# Altium PCB PA_Channel_RF3.PcbDoc
Units mm, origin at the board's own origin, x right, y up, seen from the top; angles counter-clockwise.
Board outline 40.62 x 29.5 mm, 2 copper layers (Top Layer, Bottom Layer), stack 1.071 mm thick; 37 components, 88 nets, 131 pads, 207 vias.
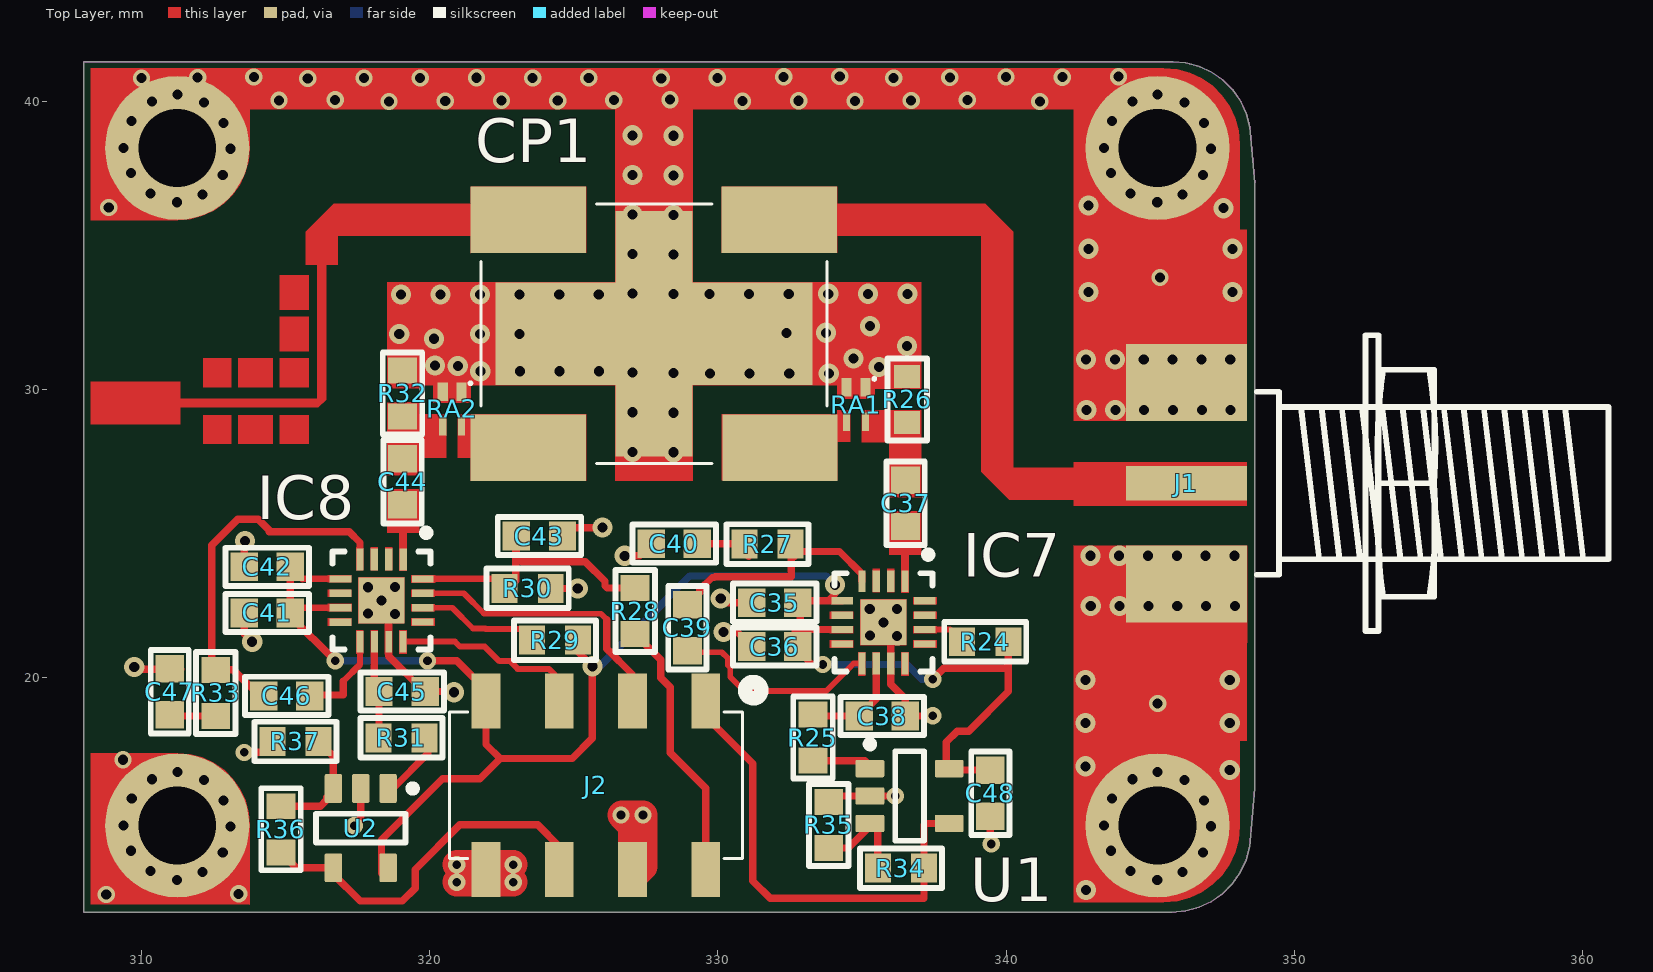
[diagram p0: Top Layer view]
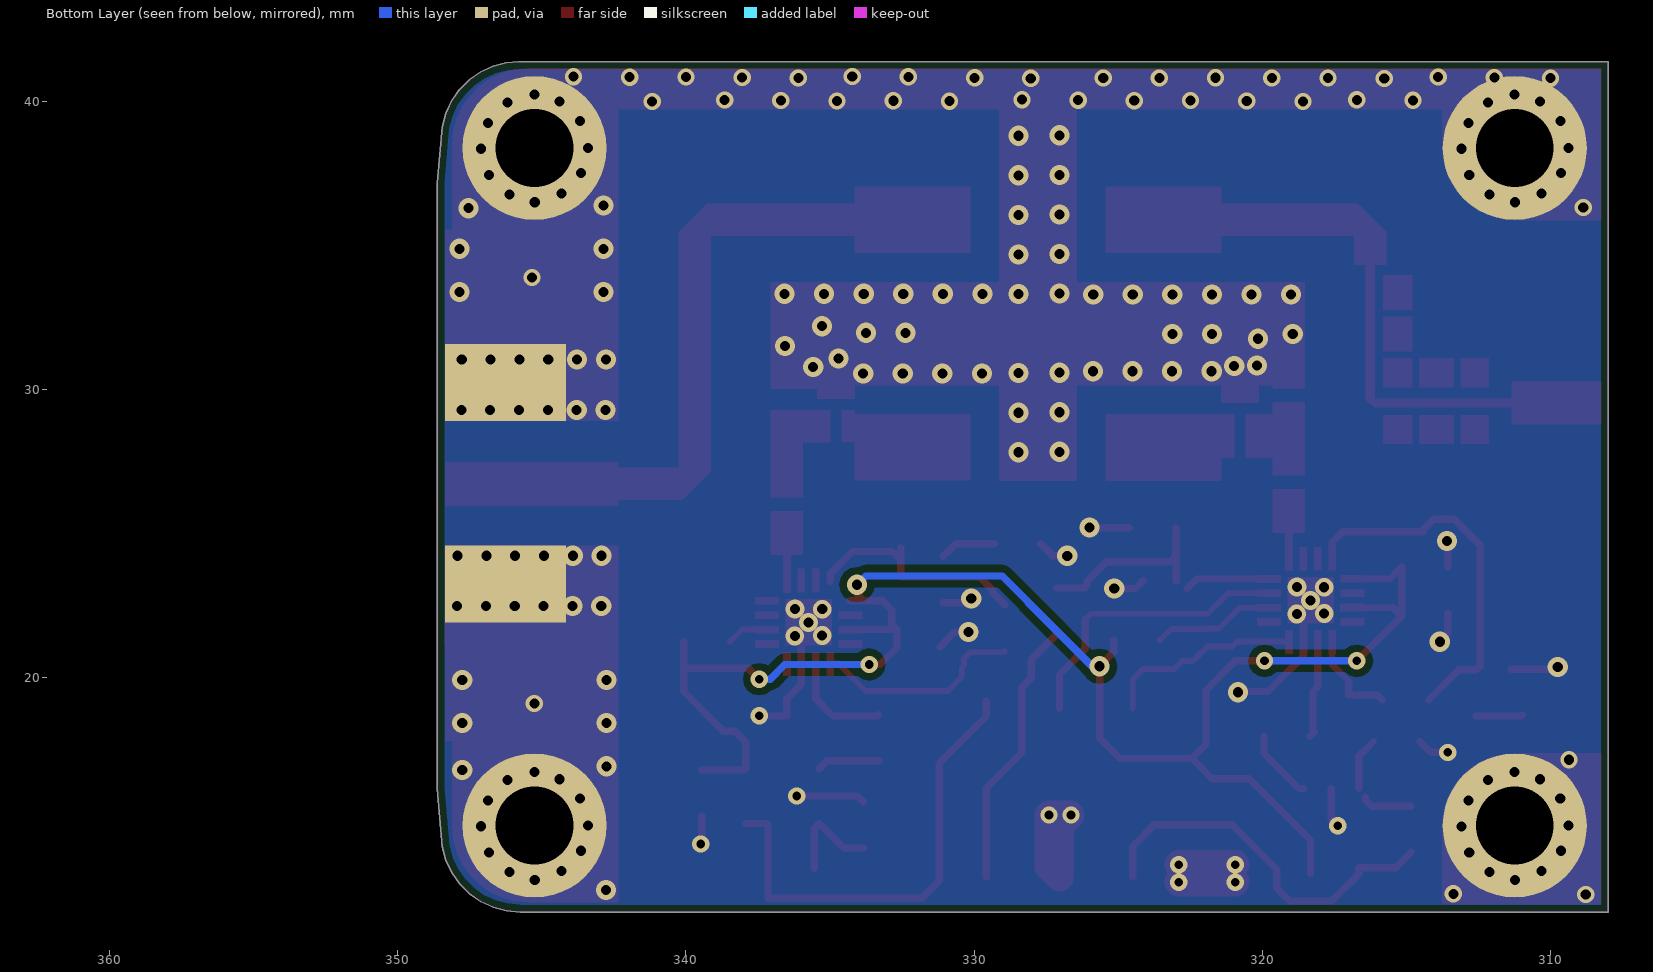
[diagram p1: Bottom Layer view, seen from below]
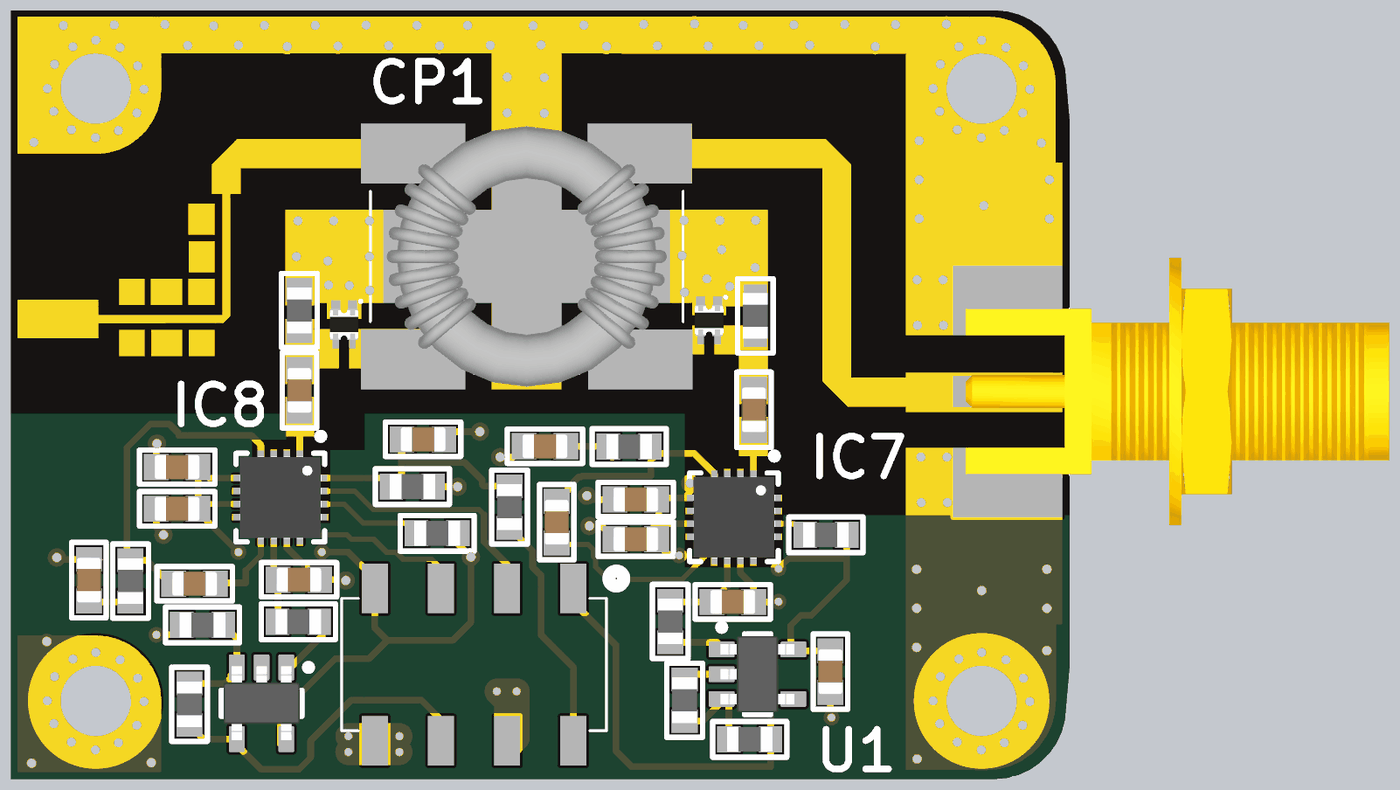
[diagram p2: 3D render of the assembled board from above, using the file's embedded part models]

## Layer stack, top to bottom
Top Solder: solder mask 0.0102, Solder Resist, Dk 3.5
Top Layer: signal copper 0.0356
Dielectric1: core 1, FR-4, Dk 4.8
Bottom Layer: signal copper 0.0356
Bottom Solder: solder mask 0.0102, Solder Resist, Dk 3.5

## Board outline
308,11.875 345.74,11.875 346.229,11.918 346.681,12.039 347.115,12.241 347.508,12.516 347.847,12.855 348.122,13.248 348.324,13.682 348.448,14.145 348.625,16.159 348.625,37.177 348.455,39.107 348.331,39.57 348.129,40.004 347.854,40.397 347.515,40.736 347.122,41.011 346.688,41.213 346.225,41.337 345.79,41.375 308,41.375

## Design rules (kind name [scope] priority, off if disabled: settings)
Clearance [All] p1: gap=0.25
HoleSize [All] p1: absolutevalues=TRUE maxlimit=5 minlimit=0.2 maxpercent=80.000 minpercent=20.000
HoleToHoleClearance [All] p1: gap=0.2 allowstackedmicrovias=TRUE
MinimumSolderMaskSliver [All] p1: minsoldermaskwidth=0
PolygonConnect [All] p1: connectstyle=Direct reliefconductorwidth=0.254 reliefentries=4 polygonreliefangle="90 Angle" airgapwidth=0.254
RoomDefinition U_Preamp_protection [InComponentClass('U_Preamp_protection')] p1 off: confinementstyle=ConfineIn formatcopy=TRUE lockcomponents=FALSE outline 117.25,-4.25 157.75,-4.25 157.75,27.75 117.25,27.75
RoutingVias [All] p1: holewidth=0.711 width=1.27 viastyle="Through Hole" minholewidth=0.2 minwidth=0.5 maxholewidth=0.711 maxwidth=1.27
SilkToSolderMaskClearance [IsPad] p1: minsilkscreentomaskgap=0 clearancetoexposedcopper=TRUE
SolderMaskExpansion [All] p1: expansion=0.102
Width [All] p1: maxlimit=2 minlimit=0.152 preferedwidth=0.254
26 further rules are at their usual default settings.

## Components (designator, comment, footprint, x,y, rotation, side; value= is the part's Value field where it differs from the comment)
C35 "100n" 0603C 331.978,22.606 r180 top
C36 "100p" 0603C 331.978,21.082 r180 top
C37 "470n" 0603C 336.514,26.049 r270 top
C38 "100n" 0603C 335.7,18.675 r180 top
C39 "100n" 0603C 328.943,21.737 r90 top
C40 "100n" 0603C 328.492,24.651 r180 top
C41 "100n" 0603C 314.375,22.25 r180 top
C42 "100p" 0603C 314.375,23.85 r180 top
C43 "100n" 0603C 323.813,24.917 r180 top
C44 "470n" 0603C 319.069,26.798 r270 top
C45 "100n" 0603C 319.05,19.525 r180 top
C46 "100n" 0603C 315.046,19.375 r180 top
C47 "100n" 0603C 310.99,19.513 r90 top
C48 "100n" 0603C 339.45,16 r90 top
CP1 "COUPLER_CUST_TF" COUPLER_CUST_TF 327.792,31.933 r0 top
IC7 "HMC7832" QFN50P300X300X80_HS-17N#1 335.746,21.923 r270 top
IC8 "HMC7832" QFN50P300X300X80_HS-17N#2 318.337,22.68 r270 top
J1 "SMA" MOLEX_73251-2121 346.25,26.75 r180 top
J2 "ZL264-8DG" ZL264-8DG 325.77,16.27 r180 top
R24 "10k" 0603R#1 339.275,21.25 r180 top
R25 "4k7" 0603R#1 333.3,17.925 r90 top
R26 "24R9" 0603R#2 336.565,29.656 r90 top
R27 "4R02" 0603R#1 331.724,24.638 r180 top
R28 "4k7" 0603R#1 327.133,22.315 r90 top
R29 "10k" 0603R#1 324.354,21.307 r180 top
R30 "10k" 0603R#1 323.405,23.101 r180 top
R31 "4k7" 0603R#1 319.026,17.916 r180 top
R32 "24R9" 0603R#1 319.064,29.863 r90 top
R33 "4R02" 0603R#1 312.585,19.476 r270 top
R34 "10k" 0603R#1 336.35,13.4 r180 top
R35 "10k" 0603R#1 333.85,14.9 r90 top
R36 "10k" 0603R#1 314.848,14.746 r90 top
R37 "10k" 0603R#1 315.348,17.792 r180 top
RA1 "EXB-24AT3AR3X" CAC-65P100X100-4L 334.793,29.479 r270 top
RA2 "EXB24ATAAR5X" CAC-65P100X100-4L 320.785,29.326 r270 top
U1 "LMV321M5X" DBV0005A_N 336.65,15.9 r0 top
U2 "LMV321M5X" DBV0005A_N 317.615,14.787 r270 top

## Footprints (in the part's own frame and the unit in brackets; to place one, negate y for a bottom-side part, rotate by r counter-clockwise, add the part's x,y. Pads: shape width x height; smd on the part's side, far side on the other; paste and mask are expansions set on the pad)
0603C [mm]
  rect 0.95x1 smd: 1(-0.8,0) 2(0.8,0)
  silkscreen extent -1.45,-0.66 1.45,0.66, body extent -0.87,-0.47 0.88,0.48, height 0.87
0603R#1 [mm]
  rect 0.9x1 smd: 1(-0.8,0) 2(0.8,0)
  silkscreen extent -1.42,-0.69 1.42,0.69, body extent -0.87,-0.47 0.88,0.48, height 0.55
0603R#2 [mm]
  rect 0.8x0.9 smd: 1(-0.8,0) 2(0.8,0)
  silkscreen extent -1.42,-0.69 1.42,0.69, body extent -0.87,-0.47 0.88,0.48, height 0.55
CAC-65P100X100-4L [mm] "Chip Array, ConvexE, 4-Leads, Pitch 0.65mm,  Body 1.00x1.00mm,  IPC High Density"
  rect 0.65x0.35 smd: 1(-0.6,0.325) 2(-0.6,-0.325)
  rect 0.65x0.25 smd: 3(0.6,-0.325) 4(0.6,0.325)
  silkscreen extent -0.94,0.59 -0.84,0.68, body extent -0.6,-0.55 0.6,0.55, height 0.45
COUPLER_CUST_TF [mm]
  rect 4x2.3 smd: 1(-4.362,3.95) 2(4.337,3.95) 3(-4.362,-3.95) 4(4.363,-3.95)
  rect 11x3.56 smd: 5(0,0)
  rect 2.67x8.5 smd: 6(0,0)
  silkscreen extent -6,-4.5 6,4.5, body extent -5.38,-5 5.38,5, height 7.86
DBV0005A_N [mm] "SOT23, 5-Leads, Body 3.05x1.75mm, Pitch 0.95mm, IPC Medium Density"
  rrect17% 1x0.6 smd: 1(-1.375,0.95) 2(-1.375,0) 3(-1.375,-0.95) 4(1.375,-0.95) 5(1.375,0.95)
  silkscreen extent -1.5,-1.55 0.5,1.92, body extent -1.42,-1.46 1.42,1.46, height 1.08
MOLEX_73251-2121 [mm] "50 Ohm, SMA Edge Mount PCB, With Jam Nut And Lock Washer"
  rect 4.19x1.2 smd: 1(0,0)
  rect 4.19x2.665 smd: 2(0,3.492) 2(0,-3.492)
  rect 4.19x2.665 smd far side: 2(0,3.492) 2(0,-3.492)
  silkscreen extent -14.64,-5.13 -2.44,5.13, body extent -14.64,-5.13 1.62,5.13, height 5.76
QFN50P300X300X80_HS-17N#1 [mm] "QFN, 16-Leads, Body 3.00x3.00mm, Pitch 0.50mm, Thermal Pad 1.60x1.60mm, IPC Medium Density"
  rect 0.75x0.25 smd: 1(-1.425,0.75) 2(-1.425,0.25) 3(-1.425,-0.25) 4(-1.425,-0.75) 9(1.425,-0.75) 10(1.425,-0.25) 11(1.425,0.25) 12(1.425,0.75)
  rect 0.25x0.75 smd: 5(-0.75,-1.425) 6(-0.25,-1.425) 7(0.25,-1.425) 8(0.75,-1.425) 13(0.75,1.425) 14(0.25,1.425) 15(-0.25,1.425) 16(-0.75,1.425)
  rect 1.58x1.58 smd: 17(0,0)
  silkscreen extent -2.47,-1.7 1.7,1.7, body extent -1.58,-1.58 1.58,1.58, height 0.8
QFN50P300X300X80_HS-17N#2 [mm] "QFN, 16-Leads, Body 3.00x3.00mm, Pitch 0.50mm, Thermal Pad 1.60x1.60mm, IPC Medium Density"
  rect 0.75x0.25 smd: 1(-1.425,0.75) 2(-1.425,0.25) 3(-1.425,-0.25) 4(-1.425,-0.75)
  rect 0.25x0.75 smd: 5(-0.75,-1.425) 6(-0.25,-1.425) 7(0.25,-1.425) 8(0.75,-1.425) 14(0.25,1.425) 15(-0.25,1.425) 16(-0.75,1.425)
  rect 0.75x0.24 smd: 9(1.425,-0.75) 10(1.425,-0.25) 11(1.425,0.25) 12(1.425,0.75)
  rect 0.24x0.75 smd: 13(0.75,1.425)
  rect 1.6x1.6 smd: 17(0,0)
  silkscreen extent -2.47,-1.7 1.7,1.7, body extent -1.58,-1.58 1.58,1.58, height 0.8
ZL264-8DG [mm]
  rect 1x1.9 smd: 1(-3.81,-2.921) 2(-3.81,2.921) 3(-1.27,-2.921) 4(-1.27,2.921) 5(1.27,-2.921) 6(1.27,2.921) 7(3.81,-2.921) 8(3.81,2.921)
  silkscreen extent -5.74,-3.59 5.08,2.54, body extent -5.08,-3.56 5.08,3.56, height 7.5

## Part data
C35 C36 C37 C38 C39 C40 C41 C42 C43 C44 C45 C46 C47 C48: library part CAP_SMD_0603, "Capacitor SMD"
CP1: library part IND_COUPLER_TF, "custom coupler"
IC7 IC8: library part ADL5904, "DC   to 6 GHz  , 45 dB DC  to 6 GHz , 45 dB TruPwr Detector with Envelope Threshold Detection"
J1: library part MOLEX_73251-2121
J2: library part "CON_2X4 2.54 SMT FEM", "2.54mm pitch connector"
R24 R25 R26 R27 R28 R29 R30 R31 R32 R33 R34 R35 R36 R37: library part RES_0603, "SMD Resistor"
RA1: library part RES_ATT_3dB, "3dB Chip Attenuator"
RA2: library part RES_ATT_10dB, "10dB Chip Attenuator"
U1 U2: library part CMP-0055-01048-3, "General Purpose, Low Voltage, Rail-to-Rail Output Operational Amplifiers, 5-pin SOT-23"

## Free pads (board coordinates)
  round 5 hole 2.7 unplated: 0(311.251,14.875) 5(311.25,38.375) 7(345.25,14.875) 10(345.25,38.375)

## Via types
v1: diameter 0.7, hole 0.35, Top Layer to Bottom Layer, tented both sides, 144 vias
v2: diameter 0.6, hole 0.35, Top Layer to Bottom Layer, tented both sides, 38 vias
v3: diameter 0.6, hole 0.3, Top Layer to Bottom Layer, tented both sides, 15 vias
v4: diameter 0.65, hole 0.35, Top Layer to Bottom Layer, tented both sides, 10 vias

## Nets (pads, with @x,y where several pads share a name; then routed paths per layer and width w, separated by ;. In a path a pad name is that pad's centre, name@x,y a point inside that pad or via, vN(x,y) a via of type N, cw(c..) or ccw(c..) an arc to the next point about the centre after c; other vN are vias at no path point)
ADL_Q: 
ALERT: 
FR_Q: IC8.12 J2.5 | length 7
  Top Layer w0.203: IC8.12 320.883,21.255 321.056,21.082 321.918,21.082 322.423,20.577 322.789,20.577 323.056,20.31 324.14,20.31 324.5,19.95 J2.5@324.5,18.937
FR_RST: IC8.15 J2.3 | length 10.2
  Top Layer w0.2: IC8.15 321.189,22.93 321.891,22.228 321.891,22.224 325.946,22.224 326.146,22.024
  Top Layer w0.254: 326.146,22.024 326.146,21.009 327.04,20.115 J2.3 J2.3@327.04,18.937
FR_VREF: J2.2 R28.1 | length 9.4
  Top Layer w0.254: R28.1 328.02,20.628 328.02,20 328.35,19.67 328.35,17.4 329.58,16.17 J2.2@329.58,13.095
FRPWR: J2.6 R36.1 U2.4 | length 13.3
  Top Layer w0.254: R36.1 315.382,13.412 U2.4 316.665,13.192 317.6,12.257 319.057,12.257 319.5,12.7 319.5,13.35 321.05,14.9 323.75,14.9 324.5,14.15 J2.6@324.5,13.095
GND: C35.2 C36.2 C38.1 C40.2 C41.2 C42.2 C43.1 C45.1 C47.2 C48.1 CP1.5 CP1.6 IC7.11 IC7.17 IC8.11 IC8.17 J1.2 J2.4 J2.8 pad.0 pad.5 pad.7 pad.10 R26.2 R30.1 R32.2 R35.2 R37.2 RA1.1 RA1.2 RA2.1 RA2.2 U1.2 U2.2 | length 32.7
  Top Layer w0.254: v1(309.759,20.38) 309.838,20.301 C47.2@311.383,20.301 ; C41.2 313.575,21.525 v1(313.85,21.25) ; C42.2 313.575,24.725 v1(313.6,24.75) ; v3(313.578,17.413) 314.169,17.413 R37.2 ; v3(317.388,14.873) 317.615,15.1 U2.2 ; IC8.17@318.45,22.525 IC8.17@318.7,22.275 ; IC8.11 318.587,20.75 319.812,19.525 C45.1 320.825,19.525 v1(320.85,19.5) ; R30.1@324.134,23.366 324.404,23.096 v1(325.142,23.096) ; C43.1@324.616,25.209 v1(325.996,25.209) ; v1(326.771,24.232) 327.273,24.232 C40.2 ; 327.04,14.49 327.15,14.6 ; v1(330.1,22.75) 330.25,22.6 C35.2@331.075,22.6 ; v1(330.2,21.59) 330.67,21.59 C36.2 ; R35.2 334.05,15.9 v3(336.15,15.9) ; IC7.17 335.996,21.673 IC7.11 335.996,19.775 336.5,19.271 C38.1 337.446,18.675 v3(337.454,18.683) ; C48.1 339.45,14.274 v3(339.486,14.238)
  Top Layer w1: v3(320.947,12.913) v3(322.905,12.913) ; v3(320.948,13.521) v3(322.906,13.521) ; J2.4@327.04,13.095 327.406,13.461 v3(327.406,15.24) 326.674,15.24 327.04,14.874 327.04,14.49 J2.4
  other v1: 342.775,12.646 311.241,12.993 345.24,12.994 312.123,13.267 346.123,13.267 310.317,13.295 344.316,13.296 312.83,13.941 346.829,13.941 309.643,14.002 343.643,14.002 313.104,14.85 347.104,14.85 309.39,14.878 343.39,14.879 312.858,15.747 346.858,15.748 309.671,15.808 343.671,15.809 312.184,16.454 346.184,16.454 310.378,16.482 344.377,16.482 311.254,16.735 345.254,16.735 347.756,16.806 342.756,16.931 342.756,18.43 347.756,18.43 342.756,19.929 347.756,19.929 342.935,22.487 343.935,22.487 344.935,22.487 345.935,22.487 346.935,22.487 347.935,22.487 342.921,24.234 343.921,24.234 344.921,24.234 345.921,24.234 346.921,24.234 347.921,24.234 328.464,27.822 327.044,27.838 328.464,29.194 327.044,29.21 342.787,29.289 343.787,29.289 344.787,29.289 345.787,29.289 346.787,29.289 347.787,29.289 328.464,30.567 329.733,30.555 331.105,30.555 332.477,30.555 333.849,30.555 327.044,30.583 321.763,30.634 323.135,30.634 324.507,30.634 325.879,30.634 335.583,30.78 320.982,30.818 320.188,30.833 342.773,31.036 343.773,31.036 344.773,31.036 345.773,31.036 346.773,31.036 347.773,31.036 334.706,31.077 336.556,31.505 320.157,31.76 318.951,31.927 321.755,31.928 323.127,31.928 332.381,31.966 333.754,31.966 335.275,32.196 319.01,33.3 320.382,33.3 321.755,33.3 323.127,33.3 324.499,33.3 325.871,33.3 328.464,33.311 327.044,33.327 329.715,33.318 331.087,33.318 332.459,33.318 333.831,33.318 335.203,33.318 336.576,33.318 342.853,33.38 347.853,33.38 328.464,34.683 327.044,34.699 342.853,34.879 347.853,34.879 328.464,36.056 327.044,36.072 347.542,36.288 342.853,36.378 311.24,36.494 345.24,36.494 312.123,36.768 346.123,36.768 310.316,36.796 344.316,36.796 328.464,37.428 312.829,37.441 327.044,37.444 346.829,37.441 309.642,37.502 343.643,37.502 313.104,38.35 347.104,38.35 309.39,38.379 343.39,38.379 328.464,38.8 327.044,38.816 312.857,39.248 346.858,39.248 309.671,39.309 343.671,39.309 312.184,39.954 346.184,39.954 310.377,39.983 344.377,39.983 311.254,40.235 345.254,40.235
  other v2: 308.788,12.487 313.382,12.507 309.372,17.157 345.255,19.111 345.338,33.883 308.875,36.313 318.598,39.992 341.168,39.989 320.546,40.009 324.447,40.019 330.857,39.999 332.805,40.016 334.758,40.009 314.78,40.029 316.728,40.046 322.494,40.026 326.395,40.036 336.706,40.026 338.654,40.043 328.343,40.053 310.008,40.797 315.778,40.784 317.726,40.801 319.676,40.803 323.579,40.802 325.524,40.802 328.037,40.791 329.985,40.808 336.1,40.805 311.96,40.821 321.627,40.811 338.048,40.822 341.949,40.832 313.908,40.838 332.282,40.842 334.23,40.859 339.996,40.839 343.897,40.849
  other v3: 326.644,15.24
  other v4: 336.219,21.449 335.272,21.467 335.745,21.92 318.809,22.211 317.862,22.229 335.27,22.38 336.215,22.391 318.335,22.682 317.86,23.143 318.805,23.153
IN_PWR: R31.1 U2.1 | length 2.5
  Top Layer w0.254: U2.1 318.733,16.162 319.95,17.379 R31.1@319.95,17.975
INPWR: 
NetC2_1: 
NetC9_1: 
NetC9_2: 
NetC10_1: 
NetC10_2: 
NetC13_1: 
NetC16_1: 
NetC19_1: 
NetC20_2: 
NetC21_1: 
NetC21_2: 
NetC22_1: 
NetC22_2: 
NetC23_2: 
NetC24_1: 
NetC24_2: 
NetC25_1: 
NetC25_2: 
NetC26_1: 
NetC26_2: 
NetC27_2: 
NetC30_2: 
NetC31_1: 
NetC31_2: 
NetC32_2: 
NetC33_1: 
NetC33_2: 
NetC34_1: 
NetC37_1: C37.1 R26.1 RA1.4
NetC37_2: C37.2 IC7.1 | length 0.1
  Top Layer w0.254: C37.2@336.325,25.1 C37.2@336.4,25.025
NetC38_2: C38.2 IC7.10 R25.2 | length 3.7
  Top Layer w0.254: R25.2 333.35,18.675 C38.2 335.494,19.269 335.494,20.496 IC7.10
NetC39_1: C39.1 IC7.9 | length 7.4
  Top Layer w0.203: C39.1 328.943,20.888 330.14,20.888 330.351,20.677 330.351,20.436 330.432,20.356 330.432,20.026 330.913,19.545 333.757,19.545 334.71,20.498 IC7.9
NetC39_2: C39.2 IC7.4 R27.1 | length 8
  Top Layer w0.254: C39.2 329.373,22.967 329.373,23.051 329.799,23.477 329.883,23.477 329.906,23.5 332.55,23.5 R27.1@332.55,24.5 ; R27.1@332.673,24.221 332.831,24.379 334.221,24.379 334.996,23.604 IC7.4
NetC40_1: C40.1 R27.2 | length 2
  Top Layer w0.254: C40.1 330.643,24.651 R27.2@331.073,24.221
NetC43_2: C43.2 IC8.16 R28.2 R30.2 | length 10.2
  Top Layer w0.22: IC8.16 R30.2@322.276,23.43
  Top Layer w0.254: R30.2@322.276,23.43 R30.2 ; R30.2@322.989,23.366 322.989,25.182 C43.2@323.016,25.209 ; C43.2 323.013,24.223 323.207,24.029 325.405,24.029 326.084,23.35 326.084,23.195 326.164,23.115 R28.2
NetC44_1: C44.1 R32.1 RA2.3
NetC44_2: C44.2 IC8.1
NetC45_2: C45.2 IC8.10 R31.2 | length 3.4
  Top Layer w0.254: IC8.10 318.087,19.688 C45.2 318.25,18.175 318.2,18.125 R31.2@318.35,17.975
NetC46_1: C46.1 IC8.9 | length 3.3
  Top Layer w0.22: 317.006,19.881 317.587,20.462 IC8.9
  Top Layer w0.254: C46.1@315.843,19.231 316.018,19.406 317.006,19.406 317.006,19.881
NetC46_2: C46.2 IC8.4 R33.1 | length 12.9
  Top Layer w0.254: C46.2@314.243,19.231 313.198,20.276 R33.1 312.45,20.411 312.45,24.6 313.35,25.5 314.065,25.5 314.442,25.123 314.442,25.063 317.219,25.063 317.587,24.695 IC8.4
NetC47_1: C47.1 R33.2 | length 1.6
  Top Layer w0.254: C47.1 311.027,18.676 R33.2
NetC50_1: 
NetC51_1: 
NetC51_2: 
NetCP1_1: CP1.1
NetCP1_2: CP1.2 J1.1
NetCP1_3: CP1.3 RA2.4
NetCP1_4: CP1.4 RA1.3
NetCP2_4: 
NetCP2_6: 
NetIC1_14: 
NetIC3_1: 
NetIC3_4: 
NetIC3_6: 
NetIC7_14: IC7.14 R24.2 | length 1.5
  Top Layer w0.203: IC7.14 338.052,21.673 R24.2
NetIC8_14: IC8.14 R29.2 | length 4.3
  Top Layer w0.2: IC8.14 320.786,22.43 321.509,21.707 321.932,21.707 321.943,21.696 323.165,21.696 R29.2
NetL6_2: 
NetR2_2: 
NetR6_1: 
NetR8_1: 
NetR10_1: 
NetR21_1: 
NetR25_1: R25.1 U1.1 | length 2.2
  Top Layer w0.254: R25.1 335.1,17.125 U1.1@335.375,16.85
NetR34_2: R34.2 R35.1 U1.3 | length 3.5
  Top Layer w0.254: R35.1 334.525,14.1 335.375,14.95 335.55,14.775 R34.2
NetR36_2: R36.2 R37.1 U2.3 | length 3.6
  Top Layer w0.254: R36.2 316.217,15.546 316.438,15.767 U2.3@316.438,15.867 ; R37.1 316.665,17.275 U2.3
NetR38_2: 
P3V3: 
P3V3A: C35.1 C36.1 C41.1 C42.1 C48.2 IC7.5 IC7.7 IC8.5 IC8.7 J2.7 R24.1 R29.1 U1.5 U2.5 | length 62.5
  Top Layer w0.22: C41.1@315.465,22.43 IC8.7 ; C42.1@315.595,23.43 IC8.5
  Top Layer w0.254: C41.1@315.465,22.43 C41.1@315.175,22.14 ; C42.1@315.595,23.43 C42.1 C41.1 C41.1@315.175,22.14 ; v3(316.727,20.588) C41.1@315.175,22.14 ; U2.5@318.338,13.217 318.338,14.388 320.45,16.5 321.75,16.5 322.45,17.2 ; v3(319.928,20.588) 320.944,20.588 321.96,19.572 321.96,17.69 322.45,17.2 ; R29.1 325.154,20.896 v1(325.65,20.4) 325.65,17.9 324.95,17.2 322.45,17.2 ; v3(333.644,20.461) 333.264,20.461 332.675,21.05 332.675,21.683 ; 333.908,22.75 334.065,22.907 v1(334.065,23.227) ; IC7.7 332.685,21.673 332.675,21.683 ; IC7.5 333.175,22.673 332.854,22.352 332.854,21.862 332.675,21.683 ; v3(337.454,19.953) 337.835,20.334 340.075,20.334 ; C48.2 337.975,16.8 337.925,16.85 337.925,17.775 338.3,18.15 338.7,18.15 340.075,19.525 340.075,20.334 ; R24.1 340.075,20.334
  Bottom Layer w0.254: v3(316.727,20.588) v3(319.928,20.588) ; v1(325.65,20.4) 325.925,20.4 328.124,22.599 ; 326.056,20.559 329.028,23.531 333.761,23.531 v1(334.065,23.227) ; v3(333.644,20.461) 336.565,20.461 337.073,19.953 v3(337.454,19.953)
P5V0A1: 
RFA: 
RFB: 
RFLPWR: J2.1 R34.1 U1.4 | length 16.4
  Top Layer w0.254: J2.1 329.58,18.661 331.216,17.025 331.216,12.954 331.821,12.349 337.15,12.349 R34.1 337.15,14.9 337.2,14.95 U1.4@337.925,14.95
RST: 
SCK: 
SDA: 
VCC_PREAMP: 
VCC_PWRAMP: 
VCC_PWRAMPIN: 
VREF: 
pads on no net: IC7.2 IC7.3 IC7.6 IC7.8 IC7.12 IC7.13 IC7.15 IC7.16 IC8.2 IC8.3 IC8.6 IC8.8 IC8.13

## Polygon pours and split planes (outlines as drawn)
no net on Top Layer "Top Layer-No Net 7" (none, pour order 23): 344.302,14.35 344.221,14.523 344.172,14.707 344.155,14.897 344.172,15.087 344.221,15.271 344.302,15.444 344.411,15.601 344.546,15.736 344.703,15.845 344.876,15.926 345.06,15.975 345.25,15.992 345.44,15.975 345.624,15.926 345.797,15.845 345.954,15.736 346.089,15.601 346.198,15.444 346.279,15.271 346.328,15.087 346.345,14.897 346.328,14.707 346.279,14.523 346.198,14.35 346.089,14.193 345.954,14.058 345.797,13.949 345.624,13.868 345.44,13.819 345.25,13.802 345.06,13.819 344.876,13.868 344.703,13.949 344.546,14.058 344.411,14.193
no net on Top Layer "Top Layer-No Net 7" (none, pour order 24): 310.302,14.349 310.222,14.522 310.173,14.706 310.156,14.897 310.173,15.087 310.222,15.271 310.302,15.444 310.412,15.6 310.547,15.735 310.703,15.845 310.876,15.925 311.06,15.974 311.251,15.991 311.441,15.974 311.625,15.925 311.798,15.845 311.954,15.735 312.089,15.6 312.199,15.444 312.279,15.271 312.328,15.087 312.345,14.897 312.328,14.706 312.279,14.522 312.199,14.349 312.089,14.193 311.954,14.058 311.798,13.948 311.625,13.868 311.441,13.819 311.251,13.802 311.06,13.819 310.876,13.868 310.703,13.948 310.547,14.058 310.412,14.193
no net on Top Layer "Top Layer-No Net 7" (none, pour order 21): 310.302,37.85 310.221,38.023 310.172,38.207 310.155,38.397 310.172,38.587 310.221,38.771 310.302,38.944 310.411,39.101 310.546,39.236 310.703,39.345 310.876,39.426 311.06,39.475 311.25,39.492 311.44,39.475 311.624,39.426 311.797,39.345 311.954,39.236 312.089,39.101 312.198,38.944 312.279,38.771 312.328,38.587 312.345,38.397 312.328,38.207 312.279,38.023 312.198,37.85 312.089,37.693 311.954,37.558 311.797,37.449 311.624,37.368 311.44,37.319 311.25,37.302 311.06,37.319 310.876,37.368 310.703,37.449 310.546,37.558 310.411,37.693
no net on Top Layer "Top Layer-No Net 7" (none, pour order 22): 344.302,37.85 344.221,38.023 344.172,38.207 344.155,38.397 344.172,38.587 344.221,38.771 344.302,38.944 344.411,39.101 344.546,39.236 344.703,39.345 344.876,39.426 345.06,39.475 345.25,39.492 345.44,39.475 345.624,39.426 345.797,39.345 345.954,39.236 346.089,39.101 346.198,38.944 346.279,38.771 346.328,38.587 346.345,38.397 346.328,38.207 346.279,38.023 346.198,37.85 346.089,37.693 345.954,37.558 345.797,37.449 345.624,37.368 345.44,37.319 345.25,37.302 345.06,37.319 344.876,37.368 344.703,37.449 344.546,37.558 344.411,37.693
GND on Bottom Layer "L3-No Net" (solid, remove dead copper, pour order 34): 307.742,42.258 348.832,42.258 348.832,11.849 307.742,11.849

## Keep-outs
Keep-Out Layer:
  the board outline again, w0.01

## Other copper
Top Layer:
  region net GND: 308.25,12.139 313.765,12.136 313.77,14.886 313.732,15.32 313.619,15.742 313.434,16.138 313.184,16.496 312.875,16.804 312.518,17.055 312.122,17.239 311.7,17.353 311.265,17.391 308.25,17.391
  region net GND: 308.243,35.873 311.263,35.868 311.697,35.906 312.119,36.019 312.515,36.203 312.873,36.454 313.182,36.762 313.432,37.12 313.617,37.516 313.73,37.938 313.768,38.373 313.768,41.14 308.248,41.145
  region net GND: 342.341,40.886 344.223,40.892 344.402,40.975 344.866,41.1 345.101,41.12 345.329,41.141 345.471,41.142 345.928,41.102 346.37,40.984 346.786,40.789 347.161,40.527 347.486,40.202 347.749,39.828 347.943,39.412 348.061,38.969 348.101,38.512 348.102,35.542 348.346,35.542 348.352,28.913 342.347,28.908
  region: 318.459,23.724 318.709,23.724 318.709,24.537 318.459,24.537
  region net NetCP1_4: 334.144,28.183 334.144,29.283 334.594,29.283 334.594,28.183
  region net NetC37_1: 334.996,28.99 334.996,29.24 335.296,29.24 335.296,28.99
  region: 335.869,22.962 335.869,23.775 336.119,23.775 336.119,22.962
  region: 317.959,23.724 317.959,24.537 318.209,24.537 318.209,23.724
  region net NetC46_2: 317.459,23.724 317.459,24.537 317.709,24.537 317.709,23.724
  region net P3V3A: 316.479,23.308 316.479,23.558 317.292,23.558 317.292,23.308
  region: 316.479,22.808 317.292,22.808 317.292,23.058 316.479,23.058
  region: 316.479,21.808 316.479,22.058 317.292,22.058 317.292,21.808
  region net NetC46_1: 317.459,20.829 317.709,20.829 317.709,21.642 317.459,21.642
  region net NetC45_2: 317.959,20.829 318.209,20.829 318.209,21.642 317.959,21.642
  region net FR_Q: 318.959,20.829 319.209,20.829 319.209,21.642 318.959,21.642
  region net FR_RST: 319.375,22.808 320.188,22.808 320.188,23.058 319.375,23.058
  region net NetIC8_14: 319.375,22.308 320.188,22.308 320.188,22.558 319.375,22.558
  region: 319.375,21.808 320.188,21.808 320.188,22.058 319.375,22.058
  region: 335.369,22.962 335.619,22.962 335.619,23.775 335.369,23.775
  region: 333.889,22.046 334.702,22.046 334.702,22.296 333.889,22.296
  region net P3V3A: 333.889,21.546 334.702,21.546 334.702,21.796 333.889,21.796
  region: 333.889,21.046 334.702,21.046 334.702,21.296 333.889,21.296
  region: 336.785,22.546 336.785,22.796 337.598,22.796 337.598,22.546
  region: 336.785,22.046 336.785,22.296 337.598,22.296 337.598,22.046
  region net NetIC7_14: 336.785,21.546 337.598,21.546 337.598,21.796 336.785,21.796
  region: 336.785,21.046 336.785,21.296 337.598,21.296 337.598,21.046
  region net NetC39_1: 334.869,20.067 335.119,20.067 335.119,20.88 334.869,20.88
  region net NetC38_2: 335.369,20.067 335.619,20.067 335.619,20.88 335.369,20.88
  region net GND: 335.869,20.067 336.119,20.067 336.119,20.88 335.869,20.88
  region: 336.369,20.067 336.619,20.067 336.619,20.88 336.369,20.88
  region: 314.813,31.329 314.813,32.521 315.813,32.521 315.813,31.329
  region: 312.151,30.079 313.121,30.079 313.121,31.079 312.151,31.079
  region: 312.151,28.115 313.121,28.115 313.121,29.115 312.151,29.115
  region: 313.371,28.115 313.371,29.115 314.563,29.115 314.563,28.115
  region: 314.813,28.115 314.813,29.115 315.813,29.115 315.813,28.115
  region: 318.459,23.724 318.709,23.724 318.709,24.537 318.459,24.537
  region net GND: 313.475,39.724 313.475,41.14 333.214,41.14 333.214,39.724
  region net NetCP1_4: 330.144,26.847 330.144,29.137 334.144,29.137 334.144,26.847
  region net NetCP1_4: 334.144,28.183 334.144,29.283 334.594,29.283 334.594,28.183
  region net NetC37_1: 334.996,28.99 334.996,29.24 335.296,29.24 335.296,28.99
  region: 335.869,22.962 335.869,23.775 336.119,23.775 336.119,22.962
  region net NetCP1_4: 332.144,27.275 332.144,28.251 334.144,28.251 334.144,27.275
  region net NetCP1_2: 334.144,34.737 334.144,37.027 330.144,37.027 330.144,34.737
  region: 317.959,23.724 317.959,24.537 318.209,24.537 318.209,23.724
  region net NetC46_2: 317.459,23.724 317.459,24.537 317.709,24.537 317.709,23.724
  region net P3V3A: 316.479,23.308 316.479,23.558 317.292,23.558 317.292,23.308
  region: 316.479,22.808 317.292,22.808 317.292,23.058 316.479,23.058
  region: 316.479,21.808 316.479,22.058 317.292,22.058 317.292,21.808
  region net NetC46_1: 317.459,20.829 317.709,20.829 317.709,21.642 317.459,21.642
  region net NetC45_2: 317.959,20.829 318.209,20.829 318.209,21.642 317.959,21.642
  region net FR_Q: 318.959,20.829 319.209,20.829 319.209,21.642 318.959,21.642
  region net FR_RST: 319.375,22.808 320.188,22.808 320.188,23.058 319.375,23.058
  region net NetIC8_14: 319.375,22.308 320.188,22.308 320.188,22.558 319.375,22.558
  region: 319.375,21.808 320.188,21.808 320.188,22.058 319.375,22.058
  region: 335.369,22.962 335.619,22.962 335.619,23.775 335.369,23.775
  region: 333.889,22.046 334.702,22.046 334.702,22.296 333.889,22.296
  region net P3V3A: 333.889,21.546 334.702,21.546 334.702,21.796 333.889,21.796
  region: 333.889,21.046 334.702,21.046 334.702,21.296 333.889,21.296
  region: 336.785,22.546 336.785,22.796 337.598,22.796 337.598,22.546
  region: 336.785,22.046 336.785,22.296 337.598,22.296 337.598,22.046
  region net NetIC7_14: 336.785,21.546 337.598,21.546 337.598,21.796 336.785,21.796
  region: 336.785,21.046 336.785,21.296 337.598,21.296 337.598,21.046
  region net NetC39_1: 334.869,20.067 335.119,20.067 335.119,20.88 334.869,20.88
  region net NetC38_2: 335.369,20.067 335.619,20.067 335.619,20.88 335.369,20.88
  region net GND: 335.869,20.067 336.119,20.067 336.119,20.88 335.869,20.88
  region: 336.369,20.067 336.619,20.067 336.619,20.88 336.369,20.88
  region net GND: 330.138,39.725 333.21,39.72 345.329,39.72 345.329,41.141 341.285,41.137 331.66,41.141 331.655,40.73 330.144,40.73
  region net GND: 342.342,12.224 345.473,12.219 345.929,12.259 346.372,12.377 346.788,12.571 347.163,12.834 347.487,13.158 347.75,13.533 347.944,13.949 348.063,14.392 348.103,14.849 348.103,17.82 348.348,17.82 348.354,24.588 342.348,24.593
  region net NetCP1_1: 308.254,28.792 308.247,30.268 311.348,30.27 311.353,29.685 316.104,29.685 316.104,34.327 315.71,34.327 315.704,35.464 316.674,36.436 321.428,36.437 321.428,37.027 325.434,37.032 325.439,34.737 321.434,34.732 321.428,35.327 316.815,35.327 316.815,34.332 316.415,34.327 316.415,29.644 316.149,29.376 311.353,29.375 311.353,28.795
  region net GND: 317.536,21.892 ccw(c317.542,21.892) 317.542,21.887 319.125,21.887 ccw(c319.125,21.892) 319.13,21.892 319.13,23.474 ccw(c319.125,23.474) 319.125,23.479 317.542,23.479 ccw(c317.542,23.474) 317.536,23.474
  region net GND: 317.536,21.892 ccw(c317.542,21.892) 317.542,21.887 319.125,21.887 ccw(c319.125,21.892) 319.13,21.892 319.13,23.474 ccw(c319.125,23.474) 319.125,23.479 317.542,23.479 ccw(c317.542,23.474) 317.536,23.474
  region net NetC37_2: 335.938,24.275 ccw(c335.944,24.275) 335.944,24.27 336.363,24.27 336.363,22.962 ccw(c336.369,22.962) 336.369,22.957 336.619,22.957 ccw(c336.619,22.962) 336.624,22.962 336.624,24.27 337.044,24.27 ccw(c337.044,24.275) 337.049,24.275 337.049,25.775 ccw(c337.044,25.775) 337.044,25.78 335.944,25.78 ccw(c335.944,25.775) 335.938,25.775
  region net P3V3A: 316.473,22.308 ccw(c316.479,22.308) 316.479,22.303 317.292,22.303 ccw(c317.292,22.308) 317.297,22.308 317.297,22.558 ccw(c317.292,22.558) 317.292,22.563 316.479,22.563 ccw(c316.479,22.558) 316.473,22.558
  region net GND: 318.453,20.829 ccw(c318.459,20.829) 318.459,20.824 318.709,20.824 ccw(c318.709,20.829) 318.714,20.829 318.714,21.892 ccw(c318.709,21.892) 318.709,21.897 318.459,21.897 ccw(c318.459,21.892) 318.453,21.892
  region net NetC43_2: 319.369,23.308 ccw(c319.375,23.308) 319.375,23.303 320.188,23.303 ccw(c320.188,23.308) 320.193,23.308 320.193,23.558 ccw(c320.188,23.558) 320.188,23.563 319.375,23.563 ccw(c319.375,23.558) 319.369,23.558
  region net GND: 317.536,21.892 ccw(c317.542,21.892) 317.542,21.887 319.125,21.887 ccw(c319.125,21.892) 319.13,21.892 319.13,23.474 ccw(c319.125,23.474) 319.125,23.479 317.542,23.479 ccw(c317.542,23.474) 317.536,23.474
  region: 314.807,32.771 ccw(c314.813,32.771) 314.813,32.766 315.813,32.766 ccw(c315.813,32.771) 315.818,32.771 315.818,33.963 ccw(c315.813,33.963) 315.813,33.968 314.813,33.968 ccw(c314.813,33.963) 314.807,33.963
  region: 313.365,30.079 ccw(c313.371,30.079) 313.371,30.074 314.563,30.074 ccw(c314.563,30.079) 314.568,30.079 314.568,31.079 ccw(c314.563,31.079) 314.563,31.084 313.371,31.084 ccw(c313.371,31.079) 313.365,31.079
  region: 314.807,30.079 ccw(c314.813,30.079) 314.813,30.074 315.813,30.074 ccw(c315.813,30.079) 315.818,30.079 315.818,31.079 ccw(c315.813,31.079) 315.813,31.084 314.813,31.084 ccw(c314.813,31.079) 314.807,31.079
  region net GND: 318.534,30.052 319.634,30.052 ccw(c319.634,30.057) 319.639,30.057 319.639,30.152 320.128,30.152 320.128,29.537 ccw(c320.134,29.537) 320.134,29.532 321.434,29.532 ccw(c321.434,29.537) 321.439,29.537 321.439,30.152 326.454,30.152 ccw(c326.454,30.157) 326.459,30.157 326.459,33.717 ccw(c326.454,33.717) 326.454,33.722 318.534,33.722 ccw(c318.534,33.717) 318.528,33.717 318.528,30.057 ccw(c318.534,30.057)
  region net NetC44_1: 318.528,27.037 ccw(c318.534,27.037) 318.534,27.032 319.634,27.032 ccw(c319.634,27.037) 319.639,27.037 319.639,27.632 320.584,27.632 ccw(c320.584,27.637) 320.589,27.637 320.589,29.137 ccw(c320.584,29.137) 320.584,29.142 319.639,29.142 319.639,29.537 ccw(c319.634,29.537) 319.634,29.542 319.532,29.542 319.532,29.551 ccw(c319.527,29.551) 319.527,29.556 318.664,29.556 ccw(c318.664,29.551) 318.658,29.551 318.658,29.542 318.534,29.542 ccw(c318.534,29.537) 318.528,29.537
  region net NetCP1_3: 320.978,27.637 ccw(c320.984,27.637) 320.984,27.632 321.428,27.632 321.428,26.847 ccw(c321.434,26.847) 321.434,26.842 325.434,26.842 ccw(c325.434,26.847) 325.439,26.847 325.439,29.137 ccw(c325.434,29.137) 325.434,29.142 320.984,29.142 ccw(c320.984,29.137) 320.978,29.137
  region net NetC44_2: 318.528,25.037 ccw(c318.534,25.037) 318.534,25.032 318.953,25.032 318.953,23.724 ccw(c318.959,23.724) 318.959,23.719 319.209,23.719 ccw(c319.209,23.724) 319.214,23.724 319.214,25.032 319.634,25.032 ccw(c319.634,25.037) 319.639,25.037 319.639,26.537 ccw(c319.634,26.537) 319.634,26.542 318.534,26.542 ccw(c318.534,26.537) 318.528,26.537
  region net NetC37_1: 334.988,28.183 ccw(c334.994,28.183) 334.994,28.178 335.938,28.178 335.938,26.275 ccw(c335.944,26.275) 335.944,26.27 337.044,26.27 ccw(c337.044,26.275) 337.049,26.275 337.049,29.283 ccw(c337.044,29.283) 337.044,29.288 334.994,29.288 ccw(c334.994,29.283) 334.988,29.283
  region net NetC37_2: 335.938,24.275 ccw(c335.944,24.275) 335.944,24.27 336.363,24.27 336.363,22.962 ccw(c336.369,22.962) 336.369,22.957 336.619,22.957 ccw(c336.619,22.962) 336.624,22.962 336.624,24.27 337.044,24.27 ccw(c337.044,24.275) 337.049,24.275 337.049,25.775 ccw(c337.044,25.775) 337.044,25.78 335.944,25.78 ccw(c335.944,25.775) 335.938,25.775
  region net GND: 326.448,26.847 ccw(c326.454,26.847) 326.454,26.842 329.124,26.842 ccw(c329.124,26.847) 329.129,26.847 329.129,30.152 330.144,30.152 ccw(c330.144,30.157) 330.149,30.157 330.149,33.717 ccw(c330.144,33.717) 330.144,33.722 329.129,33.722 329.129,39.766 ccw(c329.124,39.766) 329.124,39.771 326.454,39.771 ccw(c326.454,39.766) 326.448,39.766
  region net GND: 329.118,30.157 ccw(c329.124,30.157) 329.124,30.152 334.138,30.152 334.138,29.683 ccw(c334.144,29.683) 334.144,29.678 335.444,29.678 ccw(c335.444,29.683) 335.449,29.683 335.449,30.02 337.044,30.02 ccw(c337.044,30.025) 337.049,30.025 337.049,33.717 ccw(c337.044,33.717) 337.044,33.722 329.124,33.722 ccw(c329.124,33.717) 329.118,33.717
  region net NetCP1_2: 334.138,35.332 ccw(c334.144,35.332) 334.144,35.327 340.244,35.327 ccw(c340.244,35.332) 340.249,35.332 340.249,35.464 ccw(c340.244,35.464) 340.247,35.468 339.279,36.436 ccw(c339.276,36.432) 339.276,36.437 334.144,36.437 ccw(c334.144,36.432) 334.138,36.432
  region net NetCP1_2: 339.138,27.143 ccw(c339.144,27.143) 339.14,27.139 340.108,26.171 ccw(c340.112,26.175) 340.112,26.17 340.244,26.17 ccw(c340.244,26.175) 340.249,26.175 340.249,35.464 ccw(c340.244,35.464) 340.238,35.464 340.238,35.337 339.144,35.337 ccw(c339.144,35.332) 339.138,35.332
  region net NetCP1_2: 340.108,26.171 ccw(c340.112,26.175) 340.112,26.17 342.342,26.17 342.342,25.975 ccw(c342.348,25.975) 342.348,25.97 348.348,25.97 ccw(c348.348,25.975) 348.353,25.975 348.353,27.475 ccw(c348.348,27.475) 348.348,27.48 342.348,27.48 ccw(c342.348,27.475) 342.342,27.475 342.342,27.28 339.144,27.28 ccw(c339.144,27.275) 339.138,27.275 339.138,27.143 ccw(c339.144,27.143) 339.14,27.139
  region net P3V3A: 316.473,22.308 ccw(c316.479,22.308) 316.479,22.303 317.292,22.303 ccw(c317.292,22.308) 317.297,22.308 317.297,22.558 ccw(c317.292,22.558) 317.292,22.563 316.479,22.563 ccw(c316.479,22.558) 316.473,22.558
  region net GND: 318.453,20.829 ccw(c318.459,20.829) 318.459,20.824 318.709,20.824 ccw(c318.709,20.829) 318.714,20.829 318.714,21.892 ccw(c318.709,21.892) 318.709,21.897 318.459,21.897 ccw(c318.459,21.892) 318.453,21.892
  region net NetC43_2: 319.369,23.308 ccw(c319.375,23.308) 319.375,23.303 320.188,23.303 ccw(c320.188,23.308) 320.193,23.308 320.193,23.558 ccw(c320.188,23.558) 320.188,23.563 319.375,23.563 ccw(c319.375,23.558) 319.369,23.558
  region net GND: 317.536,21.892 ccw(c317.542,21.892) 317.542,21.887 319.125,21.887 ccw(c319.125,21.892) 319.13,21.892 319.13,23.474 ccw(c319.125,23.474) 319.125,23.479 317.542,23.479 ccw(c317.542,23.474) 317.536,23.474
  region net GND: 334.946,21.13 ccw(c334.952,21.13) 334.952,21.125 336.535,21.125 ccw(c336.535,21.13) 336.54,21.13 336.54,22.712 ccw(c336.535,22.712) 336.535,22.717 334.952,22.717 ccw(c334.952,22.712) 334.946,22.712

## Silkscreen, mask and mechanical layers (free items; w line width, h text height)
Top Solder:
  rectangle: 321.416,26.836 325.441,29.136
  rectangle: 330.115,26.861 334.14,29.186
  rectangle: 330.154,34.742 334.179,37.067
  rectangle: 321.463,34.71 325.488,37.035
  rectangle: 333.95,23.576 337.33,30.725
  region: 321.576,24.502 321.576,30.257 318.566,30.257 318.566,24.502
  rectangle: 308,25.9 348.625,42
  rectangle: 333.85,20 337.65,26.2
  rectangle: 317.25,21.7 320.25,24.9
  rectangle: 337.65,22 348.625,26.2
  region: 315.696,35.325 321.42,35.325 321.42,34.747 325.42,34.746 325.421,37.037 321.42,37.037 321.42,36.442 316.664,36.442 315.696,35.474
  region: 339.129,27.065 339.129,35.328 340.273,35.328 340.273,35.46 340.274,26.175 340.02,26.175
  region: 314.812,28.115 315.812,28.115 315.812,29.115 314.812,29.115
  region: 313.37,28.115 314.562,28.115 314.562,29.115 313.37,29.115
  region: 312.15,28.115 312.15,29.115 313.12,29.115 313.12,28.115
  region: 312.15,30.079 313.12,30.079 313.12,31.079 312.15,31.079
  region: 313.37,30.079 314.562,30.079 314.562,31.079 313.37,31.079
  region: 314.812,30.079 315.812,30.079 315.812,31.079 314.812,31.079
  region: 314.812,31.329 315.812,31.329 315.812,31.981 314.812,31.981
  region: 314.812,32.231 315.812,32.231 315.812,33.199 314.812,33.199
  region: 308.005,27.474 317.136,27.474 317.137,31.468 308.007,31.469
  region: 311.828,27.981 316.839,27.981 316.84,31.155 311.829,31.155
  region: 317.196,27.468 317.196,36.687 314.694,36.688 314.693,27.469
  region: 329.212,26.736 329.213,40.405 326.322,40.406 326.322,26.737
  region: 337.33,33.795 318.442,33.796 318.44,29.886 337.328,29.885
  region: 311.897,29.393 ccw(c311.897,29.393) 311.897,29.393 316.137,29.393 ccw(c316.137,29.393) 316.138,29.393 ccw(c316.137,29.393) 316.137,29.393 316.09,29.393 316.09,29.797 ccw(c316.089,29.797) 316.089,29.797 311.897,29.797 ccw(c311.897,29.797) 311.897,29.797
  region: 316.089,29.393 316.089,33.449 cw(c316.089,33.449) 316.089,33.449 316.493,33.449 cw(c316.493,33.449) 316.494,33.449 316.494,29.749 cw(c316.493,29.749) 316.493,29.749 316.137,29.393 cw(c316.137,29.393) 316.137,29.393 316.089,29.393 cw(c316.089,29.393)
  region: 340.143,26.175 cw(c340.143,26.175) 340.143,26.175 340.275,26.175 340.275,27.275 cw(c340.275,27.275) 340.275,27.275 342.347,27.275 342.347,27.475 cw(c342.347,27.475) 342.347,27.475 348.347,27.475 cw(c348.347,27.475) 348.348,27.475 348.348,25.975 cw(c348.347,25.975) 348.347,25.975 342.347,25.975 cw(c342.347,25.975) 342.347,25.975 342.347,26.175
  region: 334.174,34.737 ccw(c334.174,34.737) 334.175,34.737 334.175,35.332 340.274,35.332 ccw(c340.274,35.332) 340.275,35.332 340.275,35.464 ccw(c340.274,35.464) 340.275,35.464 339.307,36.432 ccw(c339.306,36.432) 339.306,36.432 334.175,36.432 334.175,37.027 ccw(c334.174,37.027) 334.174,37.027
Bottom Solder:
  region: 325.681,19.017 327.356,17.294 330.424,20.277 328.75,22
  region: 325.164,23.723 326.838,21.999 329.225,24.319 327.551,26.042
  rectangle: 308,18.847 316.103,42
  rectangle: 307.822,11.467 348.572,19.304
  rectangle: 323.444,24.13 347.859,41.822
  rectangle: 338.48,19 348.625,24.13
  rectangle: 328.75,19 332.75,22.149
  rectangle: 315.75,24 325.75,42
  rectangle: 320.523,19 324.75,24
  rectangle: 315.75,21.209 320.75,24
  rectangle: 315.75,19 320.75,19.939
  rectangle: 324.75,19 328.75,19.558
  rectangle: 323.75,22 326.847,24
  rectangle: 334.75,21 338.75,24.384
Mechanical 1:
  the board outline again, w0.01